# Altium PCB Route_Guide_and_Tuning.PcbDoc (part 5 of 8)
Units mil, origin at the board's own origin, x right, y up, seen from the top; angles counter-clockwise.
Board outline 3600 x 2300 mil, 14 copper layers (L1 TOP, L2_G, L3 SIG, L4_G, L4 SIG, L6_P, L7_G, L10_P, L11_P, L7 SIG, L13_P, L8 SIG, L15_G, L10 BOT), stack 89.291 mil thick; 4 components, 1934 nets, 2174 pads, 2165 vias.
Unrouted connection lines stored in the file: 123.
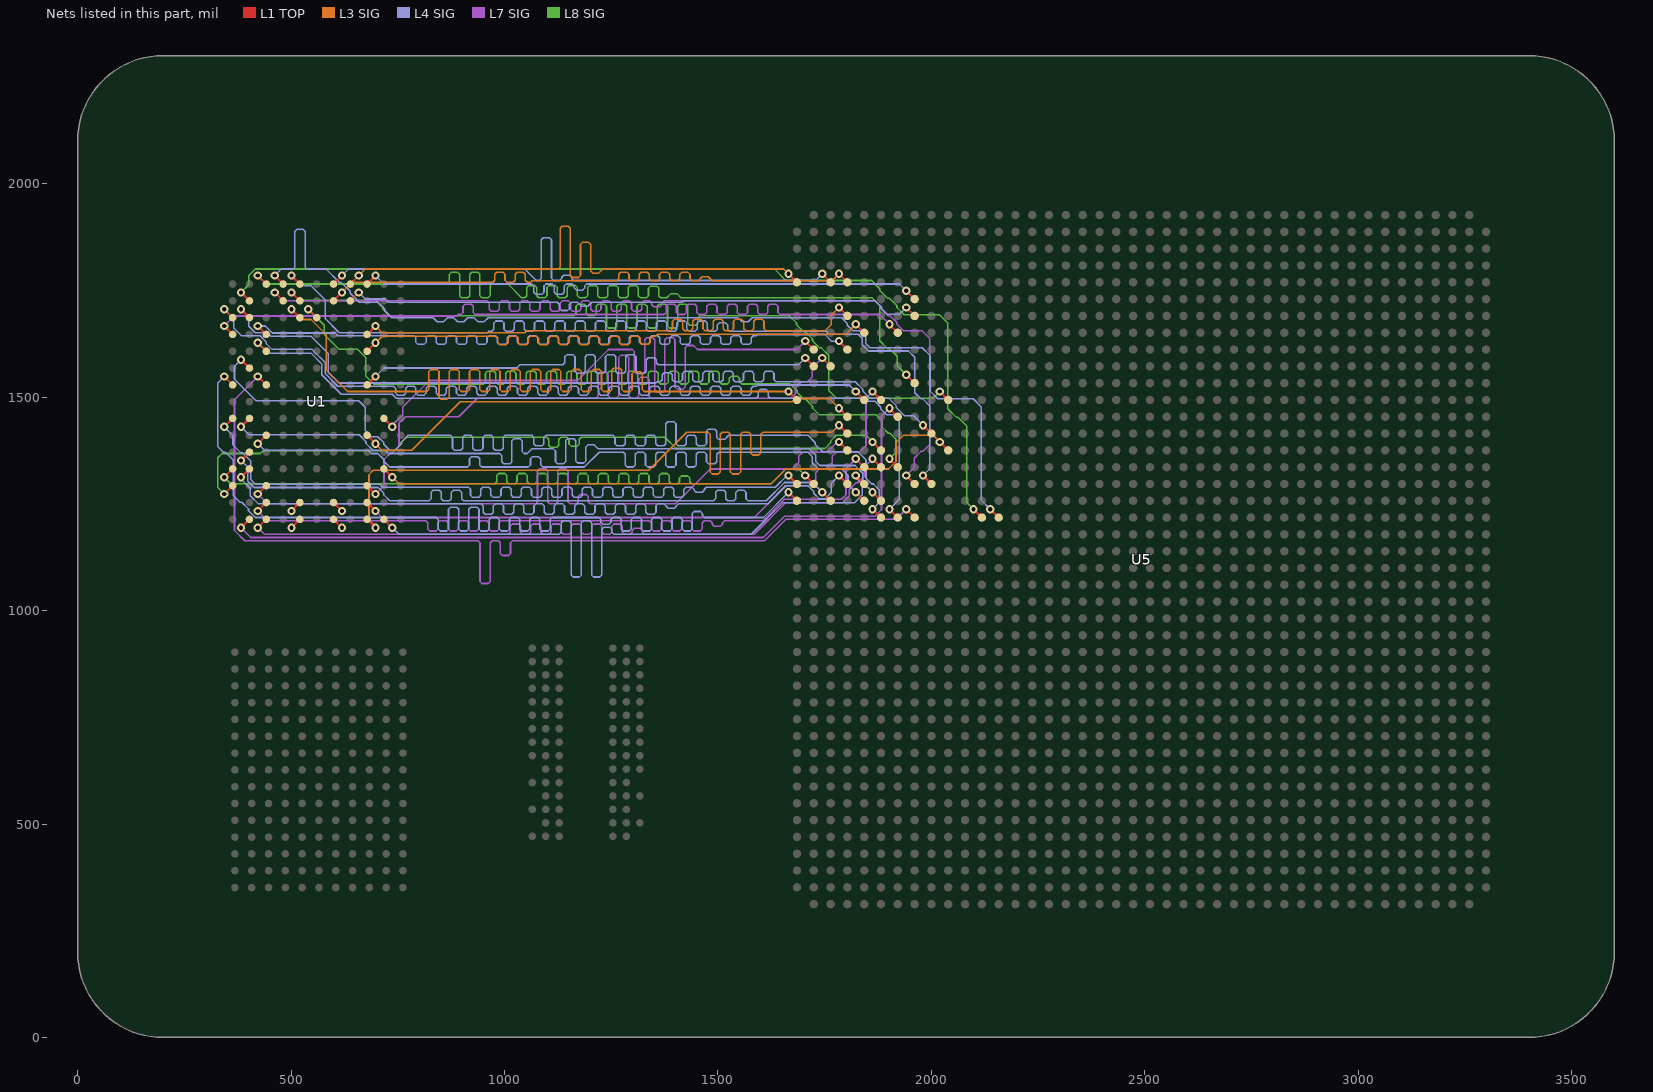
[diagram p17: the nets of this part, all layers, seen from the top]

## Via types
v1: diameter 19.4, hole 10, L1 TOP to L10 BOT, 2087 vias
v2: diameter 18.6, hole 10, L1 TOP to L10 BOT, tented both sides, 78 vias

## Nets (pads, with @x,y where several pads share a name; then routed paths per layer and width w, separated by ;. In a path a pad name is that pad's centre, name@x,y a point inside that pad or via, vN(x,y) a via of type N, cw(c..) or ccw(c..) an arc to the next point about the centre after c; other vN are vias at no path point) (continued)
QDR1.A5: U1.N6 U5.G27 | length 2267.4
  L1 TOP w5: v1(540.43,1705.87) U1.N6@560.12,1686.18 ; v1(1901.69,1355.59) U5.G27@1921.38,1335.91
  L8 SIG w3.8: v1(540.43,1705.87) 578.11,1668.19 578.11,1646.42 612.8,1611.73 656.35,1611.73 675.07,1593.01 675.07,1549.45 693.79,1530.73 950.83,1530.73 955.59,1535.49 955.59,1555.71 960.35,1560.47 974.63,1560.47 979.39,1555.71 979.39,1535.49 984.15,1530.73 998.43,1530.73 1003.19,1535.49 1003.19,1555.71 1007.95,1560.47 1022.23,1560.47 1026.99,1555.71 1026.99,1535.49 1031.75,1530.73 1046.03,1530.73 1050.79,1535.49 1050.79,1555.71 1055.55,1560.47 1069.83,1560.47 1074.59,1555.71 1074.59,1535.49 1079.35,1530.73 1093.63,1530.73 1098.39,1535.49 1098.39,1555.71 1103.15,1560.47 1117.43,1560.47 1122.19,1555.71 1122.19,1535.49 1126.95,1530.73 1141.23,1530.73 1145.99,1535.49 1145.99,1555.71 1150.75,1560.47 1165.03,1560.47 1169.79,1555.71 1169.79,1535.49 1174.55,1530.73 1188.83,1530.73 1193.59,1535.49 1193.59,1555.71 1198.35,1560.47 1212.63,1560.47 1217.39,1555.71 1217.39,1535.49 1222.15,1530.73 1236.43,1530.73 1241.19,1535.49 1241.19,1555.71 1245.95,1560.47 1260.23,1560.47 1264.99,1555.71 1264.99,1535.49 1269.75,1530.73 1284.03,1530.73 1288.79,1535.49 1288.79,1555.71 1293.55,1560.47 1307.83,1560.47 1312.59,1555.71 1312.59,1535.49 1317.35,1530.73 1331.63,1530.73 1336.39,1535.49 1336.39,1555.71 1341.15,1560.47 1355.43,1560.47 1360.19,1555.71 1360.19,1535.49 1364.95,1530.73 1379.23,1530.73 1383.99,1535.49 1383.99,1555.71 1388.75,1560.47 1403.03,1560.47 1407.79,1555.71 1407.79,1535.49 1412.55,1530.73 1426.83,1530.73 1431.59,1535.49 1431.59,1555.71 1436.35,1560.47 1450.63,1560.47 1455.39,1555.71 1455.39,1535.49 1460.15,1530.73 1474.43,1530.73 1479.19,1535.49 1479.19,1555.71 1483.95,1560.47 1498.23,1560.47 1502.99,1555.71 1502.99,1535.49 1507.75,1530.73 1522.03,1530.73 1526.79,1535.49 1526.79,1543.99 1531.55,1548.75 1545.83,1548.75 1550.59,1543.99 1550.59,1535.49 1555.35,1530.73 1669.59,1530.73 1685.48,1514.85 1685.48,1510.66 1701.36,1494.78 1705.55,1494.78 1721.56,1478.76 1721.56,1474.58 1737.83,1458.3 1870.88,1458.3 1885.32,1443.86 1885.32,1428.92 1899.11,1415.13 1903.3,1415.13 1917.09,1401.34 1917.09,1370.99 v1(1901.69,1355.59)
QDR1.A6: U1.N7 U5.A31 | length 2393.2
  L1 TOP w5: v1(501.06,1705.87) U1.N7@520.75,1686.18 ; v1(1665.47,1513.07) U5.A31@1685.16,1493.39
  L3 SIG w3.8: v1(501.06,1705.87) 525.03,1681.9 546.81,1681.9 582.09,1646.61 582.09,1563.69 632.71,1513.07 818.01,1513.07 822.77,1517.83 822.77,1560 827.53,1564.76 841.81,1564.76 846.57,1560 846.57,1500.13 851.33,1495.37 865.61,1495.37 870.37,1500.13 870.37,1560 875.13,1564.76 889.41,1564.76 894.17,1560 894.17,1517.83 898.93,1513.07 913.21,1513.07 917.97,1517.83 917.97,1560 922.73,1564.76 937.01,1564.76 941.77,1560 941.77,1517.83 946.53,1513.07 960.81,1513.07 965.57,1517.83 965.57,1560 970.33,1564.76 984.61,1564.76 989.37,1560 989.37,1517.83 994.13,1513.07 1008.41,1513.07 1013.17,1517.83 1013.17,1560 1017.93,1564.76 1032.21,1564.76 1036.97,1560 1036.97,1517.83 1041.73,1513.07 1056.01,1513.07 1060.77,1517.83 1060.77,1560 1065.53,1564.76 1079.81,1564.76 1084.57,1560 1084.57,1517.83 1089.33,1513.07 1103.61,1513.07 1108.37,1517.83 1108.37,1560 1113.13,1564.76 1127.41,1564.76 1132.17,1560 1132.17,1517.83 1136.93,1513.07 1151.21,1513.07 1155.97,1517.83 1155.97,1560 1160.73,1564.76 1175.01,1564.76 1179.77,1560 1179.77,1517.83 1184.53,1513.07 1198.81,1513.07 1203.57,1517.83 1203.57,1560 1208.33,1564.76 1222.61,1564.76 1227.37,1560 1227.37,1517.83 1232.13,1513.07 1246.41,1513.07 1251.17,1517.83 1251.17,1563.08 1255.93,1567.84 1270.21,1567.84 1274.97,1563.08 1274.97,1517.83 1279.73,1513.07 1294.01,1513.07 1298.77,1517.83 1298.77,1554.35 1303.53,1559.11 1317.81,1559.11 1322.57,1554.35 1322.57,1517.83 1327.33,1513.07 v1(1665.47,1513.07)
QDR1.A7: U1.P4 U5.H36 | length 1406.2
  L1 TOP w3.8: v1(1941.06,1709.92) U5.H36@1960.75,1690.24
  L1 TOP w5: U1.P4@638.86,1725.55 v1(658.54,1745.24)
  L4 SIG w3.8: v1(658.54,1745.24) 673.95,1729.83 720.17,1729.83 727.76,1722.24 1123.62,1722.24 1128.38,1717.48 1128.38,1707.55 1133.14,1702.79 1147.42,1702.79 1152.18,1707.55 1152.18,1717.48 1156.94,1722.24 1171.22,1722.24 1180.74,1712.72 1195.02,1712.72 1204.54,1722.24 1416.6,1722.24 1419.68,1725.32 1868.7,1725.32 1882.01,1712.02 1882.01,1707.83 1895.31,1694.52 1925.66,1694.52 v1(1941.06,1709.92)
QDR1.A8: U1.P5 U5.D38 | length 1428.9
  L1 TOP w3.8: v1(1783.58,1788.66) U5.D38@1803.27,1768.98
  L1 TOP w5: U1.P5@599.49,1725.55 v1(619.17,1745.24)
  L3 SIG w3.8: v1(619.17,1745.24) 643.13,1769.2 972.69,1769.2 977.45,1773.96 977.45,1787.65 982.21,1792.41 996.49,1792.41 1001.25,1787.65 1001.25,1773.96 1006.01,1769.2 1020.29,1769.2 1025.05,1773.96 1025.05,1787.65 1029.81,1792.41 1044.09,1792.41 1048.85,1787.65 1048.85,1773.96 1053.61,1769.2 1060.75,1769.2 1064.26,1772.71 1263.07,1772.71 1267.83,1777.47 1267.83,1787.65 1272.59,1792.41 1286.87,1792.41 1291.63,1787.65 1291.63,1777.47 1296.39,1772.71 1310.67,1772.71 1315.43,1777.47 1315.43,1787.65 1320.19,1792.41 1334.47,1792.41 1339.23,1787.65 1339.23,1777.47 1343.99,1772.71 1358.27,1772.71 1363.03,1777.47 1363.03,1787.65 1367.79,1792.41 1382.07,1792.41 1386.83,1787.65 1386.83,1777.47 1391.59,1772.71 1405.87,1772.71 1410.63,1777.47 1410.63,1787.36 1415.39,1792.12 1429.67,1792.12 1434.43,1787.36 1434.43,1777.47 1439.19,1772.71 1453.47,1772.71 1462.99,1782.23 1477.27,1782.23 1486.79,1772.71 1767.63,1772.71 v1(1783.58,1788.66)
QDR1.A9: U1.P7 U5.K31 | length 2267.4
  L1 TOP w5: v1(501.06,1745.24) U1.P7@520.75,1725.55 ; v1(2019.8,1513.07) U5.K31@2039.49,1493.39
  L8 SIG w3.8: v1(501.06,1745.24) 519.93,1726.37 699.19,1726.37 715.05,1710.51 715.05,1706.32 730.91,1690.47 1162.78,1690.47 1167.54,1695.23 1167.54,1712.98 1172.3,1717.74 1186.58,1717.74 1191.34,1712.98 1191.34,1695.23 1196.1,1690.47 1210.38,1690.47 1215.14,1695.23 1215.14,1712.98 1219.9,1717.74 1234.18,1717.74 1238.94,1712.98 1238.94,1666.56 1243.7,1661.8 1257.98,1661.8 1262.74,1666.56 1262.74,1712.98 1267.5,1717.74 1281.78,1717.74 1286.54,1712.98 1286.54,1666.56 1291.3,1661.8 1305.58,1661.8 1310.34,1666.56 1310.34,1712.98 1315.1,1717.74 1329.38,1717.74 1334.14,1712.98 1334.14,1666.56 1338.9,1661.8 1353.18,1661.8 1357.94,1666.56 1357.94,1712.98 1362.7,1717.74 1376.98,1717.74 1381.74,1712.98 1381.74,1666.56 1386.5,1661.8 1400.78,1661.8 1405.54,1666.56 1405.54,1712.98 1410.3,1717.74 1424.58,1717.74 1429.34,1712.98 1429.34,1673.21 1434.1,1668.45 1448.38,1668.45 1453.14,1673.21 1453.14,1685.71 1457.9,1690.47 1667.34,1690.47 1683.99,1673.81 1683.99,1669.62 1700.65,1652.96 1704.84,1652.96 1721.56,1636.24 1721.56,1632.05 1738.42,1615.19 1742.61,1615.19 1759.61,1598.19 1759.61,1515.26 1777.2,1497.67 2004.4,1497.67 v1(2019.8,1513.07)
QDR1.A10: U1.P8 U5.H26 | length 2300.1
  L1 TOP w5: v1(461.69,1745.24) U1.P8@481.38,1725.55 ; v1(1941.06,1316.22) U5.H26@1960.75,1296.54
  L7 SIG w3.8: v1(461.69,1745.24) 481.59,1725.34 959.53,1725.34 964.29,1720.58 964.29,1705.91 969.05,1701.15 983.33,1701.15 988.09,1705.91 988.09,1720.58 992.85,1725.34 1007.13,1725.34 1011.89,1720.58 1011.89,1705.91 1016.65,1701.15 1030.93,1701.15 1035.69,1705.91 1035.69,1720.58 1040.45,1725.34 1054.73,1725.34 1059.49,1720.58 1059.49,1705.91 1064.25,1701.15 1078.53,1701.15 1083.29,1705.91 1083.29,1720.58 1088.05,1725.34 1102.33,1725.34 1107.09,1720.58 1107.09,1705.91 1111.85,1701.15 1126.13,1701.15 1130.89,1705.91 1130.89,1720.58 1135.65,1725.34 1149.93,1725.34 1154.69,1720.58 1154.69,1705.91 1159.45,1701.15 1173.73,1701.15 1178.49,1705.91 1178.49,1720.58 1183.25,1725.34 1197.53,1725.34 1202.29,1720.58 1202.29,1705.91 1207.05,1701.15 1221.33,1701.15 1226.09,1705.91 1226.09,1720.58 1230.85,1725.34 1245.13,1725.34 1249.89,1720.58 1249.89,1705.91 1254.65,1701.15 1268.93,1701.15 1273.69,1705.91 1273.69,1720.58 1278.45,1725.34 1292.73,1725.34 1297.49,1720.58 1297.49,1705.91 1302.25,1701.15 1316.53,1701.15 1321.29,1705.91 1321.29,1720.58 1326.05,1725.34 1340.33,1725.34 1345.09,1720.58 1345.09,1716.19 1349.85,1711.43 1364.13,1711.43 1368.89,1716.19 1368.89,1720.58 1373.65,1725.34 1868.69,1725.34 1883.87,1710.15 1883.87,1705.96 1899.06,1690.78 1903.24,1690.78 1918.7,1675.33 1918.7,1671.14 1934.68,1655.15 1978.24,1655.15 1995.83,1637.56 1995.83,1388.58 1979.99,1372.74 1975.81,1372.74 1959.97,1356.9 1959.97,1335.13 v1(1941.06,1316.22)
QDR1.A11: U1.A9 U5.F27 | length 1837.4
  L1 TOP w5: v1(422.32,1194.05) U1.A9@442.01,1213.74 ; v1(1862.32,1355.59) U5.F27@1882.01,1335.91
  L7 SIG w3.8: v1(422.32,1194.05) 437.72,1178.65 1008.9,1178.65 1013.66,1183.41 1013.66,1198.06 1018.42,1202.82 1032.7,1202.82 1037.46,1198.06 1037.46,1183.41 1042.22,1178.65 1056.5,1178.65 1061.26,1183.41 1061.26,1198.06 1066.02,1202.82 1080.3,1202.82 1085.06,1198.06 1085.06,1183.41 1089.82,1178.65 1104.1,1178.65 1108.86,1183.41 1108.86,1198.06 1113.62,1202.82 1127.9,1202.82 1132.66,1198.06 1132.66,1183.41 1137.42,1178.65 1151.7,1178.65 1156.46,1183.41 1156.46,1198.06 1161.22,1202.82 1175.5,1202.82 1180.26,1198.06 1180.26,1183.41 1185.02,1178.65 1199.3,1178.65 1204.06,1183.41 1204.06,1198.06 1208.82,1202.82 1223.1,1202.82 1227.86,1198.06 1227.86,1183.41 1232.62,1178.65 1246.9,1178.65 1251.66,1183.41 1251.66,1198.06 1256.42,1202.82 1270.7,1202.82 1275.46,1198.06 1275.46,1183.41 1280.22,1178.65 1294.5,1178.65 1299.26,1183.41 1299.26,1188.17 1304.02,1192.93 1318.3,1192.93 1323.06,1188.17 1323.06,1183.41 1327.82,1178.65 1584.86,1178.65 1659.09,1252.88 1792.14,1252.88 1807.55,1268.29 1807.55,1283.23 1823.39,1299.07 1827.58,1299.07 1843.42,1314.91 1843.42,1336.69 v1(1862.32,1355.59)
QDR1.A12: U1.R3 U5.H37 | length 1406.2
  L1 TOP w5: U1.R3@678.23,1764.92 v1(697.91,1784.61) ; v1(1941.06,1749.29) U5.H37@1960.75,1729.61
  L4 SIG w3.8: v1(697.91,1784.61) 717.6,1764.92 1063.87,1764.92 1068.63,1760.16 1068.63,1745.28 1073.39,1740.52 1087.67,1740.52 1092.43,1745.28 1092.43,1760.16 1097.19,1764.92 1111.47,1764.92 1116.23,1760.16 1116.23,1745.28 1120.99,1740.52 1135.27,1740.52 1140.03,1745.28 1140.03,1760.16 1144.79,1764.92 1159.07,1764.92 1163.83,1760.16 1163.83,1755.37 1168.59,1750.61 1182.87,1750.61 1187.63,1755.37 1187.63,1760.16 1192.39,1764.92 1925.43,1764.92 v1(1941.06,1749.29)
QDR1.A13: U1.R4 U5.A38 | length 1428.9
  L1 TOP w5: U1.R4@638.86,1764.92 v1(658.54,1784.61) ; v1(1665.47,1788.66) U5.A38@1685.16,1768.98
  L3 SIG w3.8: v1(658.54,1784.61) 673.94,1800.01 1125.77,1800.01 1130.53,1804.77 1130.53,1895.25 1135.29,1900.01 1149.57,1900.01 1154.33,1895.25 1154.33,1785.07 1159.09,1780.31 1173.37,1780.31 1178.13,1785.07 1178.13,1857.58 1182.89,1862.34 1197.17,1862.34 1201.93,1857.58 1201.93,1795.25 1206.69,1790.49 1220.97,1790.49 1230.49,1800.01 1654.13,1800.01 v1(1665.47,1788.66)
QDR1.A14: U1.R5 U5.C38 | length 1406.2
  L1 TOP w3.8: v1(1744.21,1788.66) U5.C38@1763.9,1768.98
  L1 TOP w5: U1.R5@599.49,1764.92 v1(619.17,1784.61)
  L4 SIG w3.8: v1(619.17,1784.61) 634.57,1800.01 1047.57,1800.01 1074.31,1773.26 1081.45,1773.26 1086.21,1778.02 1086.21,1868.5 1090.97,1873.26 1105.25,1873.26 1110.01,1868.5 1110.01,1778.02 1114.77,1773.26 1129.05,1773.26 1133.81,1778.02 1133.81,1780.48 1138.57,1785.24 1152.85,1785.24 1157.61,1780.48 1157.61,1778.02 1162.37,1773.26 1728.81,1773.26 v1(1744.21,1788.66)
QDR1.A15: U1.R7 U5.J26 | length 2370.5
  L1 TOP w5: v1(501.06,1784.61) U1.R7@520.75,1764.92 ; v1(1980.43,1316.22) U5.J26@2000.12,1296.54
  L4 SIG w3.8: v1(501.06,1784.61) 525.03,1760.64 546.81,1760.64 579.8,1727.64 579.8,1684.09 612.8,1651.1 960.19,1651.1 963.28,1654.18 970.42,1654.18 975.18,1658.94 975.18,1673.59 979.94,1678.35 994.22,1678.35 998.98,1673.59 998.98,1658.94 1003.74,1654.18 1018.02,1654.18 1022.78,1658.94 1022.78,1673.59 1027.54,1678.35 1041.82,1678.35 1046.58,1673.59 1046.58,1658.94 1051.34,1654.18 1065.62,1654.18 1070.38,1658.94 1070.38,1673.59 1075.14,1678.35 1089.42,1678.35 1094.18,1673.59 1094.18,1658.94 1098.94,1654.18 1113.22,1654.18 1117.98,1658.94 1117.98,1673.59 1122.74,1678.35 1137.02,1678.35 1141.78,1673.59 1141.78,1658.94 1146.54,1654.18 1160.82,1654.18 1165.58,1658.94 1165.58,1673.59 1170.34,1678.35 1184.62,1678.35 1189.38,1673.59 1189.38,1658.94 1194.14,1654.18 1208.42,1654.18 1213.18,1658.94 1213.18,1673.59 1217.94,1678.35 1232.22,1678.35 1236.98,1673.59 1236.98,1658.94 1241.74,1654.18 1256.02,1654.18 1260.78,1658.94 1260.78,1673.59 1265.54,1678.35 1279.82,1678.35 1284.58,1673.59 1284.58,1658.94 1289.34,1654.18 1303.62,1654.18 1308.38,1658.94 1308.38,1673.59 1313.14,1678.35 1327.42,1678.35 1332.18,1673.59 1332.18,1658.94 1336.94,1654.18 1351.22,1654.18 1355.98,1658.94 1355.98,1673.59 1360.74,1678.35 1375.02,1678.35 1379.78,1673.59 1379.78,1658.94 1384.54,1654.18 1398.82,1654.18 1403.58,1658.94 1403.58,1673.59 1408.34,1678.35 1422.62,1678.35 1427.38,1673.59 1427.38,1658.94 1432.14,1654.18 1446.42,1654.18 1451.18,1658.94 1451.18,1673.59 1455.94,1678.35 1470.22,1678.35 1474.98,1673.59 1474.98,1658.94 1479.74,1654.18 1494.02,1654.18 1498.78,1658.94 1498.78,1669.61 1503.54,1674.37 1517.82,1674.37 1522.58,1669.61 1522.58,1658.94 1527.34,1654.18 1753.74,1654.18 1760.37,1647.55 1828.36,1647.55 1838.35,1637.56 1838.35,1622.63 1852.94,1608.03 1946.62,1608.03 1961.21,1593.44 1961.21,1510.51 1975.95,1495.77 1980.14,1495.77 1995.83,1480.08 1995.83,1331.62 v1(1980.43,1316.22)
QDR1.A16: U1.R8 U5.N24 | length 2370.5
  L1 TOP w5: v1(461.69,1784.61) U1.R8@481.38,1764.92 ; v1(2137.91,1237.48) U5.N24@2157.6,1217.8
  L4 SIG w3.8: v1(461.69,1784.61) 477.09,1800.01 504.37,1800.01 509.13,1804.77 509.13,1888.26 513.89,1893.02 528.17,1893.02 532.93,1888.26 532.93,1804.77 537.69,1800.01 581.99,1800.01 612.8,1769.21 616.98,1769.21 638.38,1747.81 638.38,1743.62 659.78,1722.23 703.33,1722.23 719.38,1706.18 719.38,1702 735.42,1685.95 833.2,1685.95 842.72,1676.43 857,1676.43 866.52,1685.95 880.8,1685.95 890.32,1676.43 904.6,1676.43 914.12,1685.95 928.4,1685.95 937.92,1676.43 952.2,1676.43 961.72,1685.95 1547.2,1685.95 1556.72,1676.43 1571,1676.43 1580.52,1685.95 1789.96,1685.95 1803.27,1672.65 1803.27,1668.46 1816.57,1655.15 1831.51,1655.15 1845.95,1640.71 1845.95,1625.77 1856.09,1615.63 1978.39,1615.63 1996.76,1597.26 1996.76,1514.34 2015.13,1495.96 2098.06,1495.96 2116.46,1477.56 2116.46,1258.93 v1(2137.91,1237.48)
QDR1.A17: U1.R9 U5.H32 | length 2267.4
  L1 TOP w5: v1(422.32,1784.61) U1.R9@442.01,1764.92 ; v1(1941.06,1552.44) U5.H32@1960.75,1532.76
  L8 SIG w3.8: v1(422.32,1784.61) 442.01,1764.92 866.27,1764.92 871.03,1769.68 871.03,1787.65 875.79,1792.41 890.07,1792.41 894.83,1787.65 894.83,1737.7 899.59,1732.94 913.87,1732.94 918.63,1737.7 918.63,1787.65 923.39,1792.41 937.67,1792.41 942.43,1787.65 942.43,1737.7 947.19,1732.94 961.47,1732.94 966.23,1737.7 966.23,1760.16 970.99,1764.92 1008,1764.92 1039.99,1732.94 1047.13,1732.94 1051.89,1737.7 1051.89,1756.62 1056.65,1761.38 1070.93,1761.38 1075.69,1756.62 1075.69,1737.7 1080.45,1732.94 1094.73,1732.94 1099.49,1737.7 1099.49,1756.62 1104.25,1761.38 1118.53,1761.38 1123.29,1756.62 1123.29,1737.7 1128.05,1732.94 1142.33,1732.94 1147.09,1737.7 1147.09,1756.62 1151.85,1761.38 1166.13,1761.38 1170.89,1756.62 1170.89,1737.7 1175.65,1732.94 1189.93,1732.94 1194.69,1737.7 1194.69,1756.62 1199.45,1761.38 1213.73,1761.38 1218.49,1756.62 1218.49,1737.7 1223.25,1732.94 1237.53,1732.94 1242.29,1737.7 1242.29,1756.62 1247.05,1761.38 1261.33,1761.38 1266.09,1756.62 1266.09,1737.7 1270.85,1732.94 1285.13,1732.94 1289.89,1737.7 1289.89,1756.62 1294.65,1761.38 1308.93,1761.38 1313.69,1756.62 1313.69,1737.7 1318.45,1732.94 1332.73,1732.94 1337.49,1737.7 1337.49,1755.36 1342.25,1760.12 1356.53,1760.12 1361.29,1755.36 1361.29,1737.7 1366.05,1732.94 1380.33,1732.94 1389.85,1742.46 1404.13,1742.46 1413.65,1732.94 1861.09,1732.94 1879.2,1714.82 1879.2,1631.89 1897.32,1613.77 1901.51,1613.77 1919.71,1595.57 1919.71,1573.79 v1(1941.06,1552.44)
QDR1.A18: U1.A3 U5.D29 | length 1801.8
  L1 TOP w5: U1.A3@678.23,1213.74 v1(697.91,1194.05) ; v1(1783.58,1434.33) U5.D29@1803.27,1414.65
  L3 SIG w3.8: v1(697.91,1194.05) 697.91,1197.96 682.51,1213.36 682.51,1318.54 692.49,1328.52 1337.75,1328.52 1427.19,1417.96 1476.85,1417.96 1481.61,1413.2 1481.61,1324.52 1486.37,1319.76 1500.65,1319.76 1505.41,1324.52 1505.41,1413.2 1510.17,1417.96 1524.45,1417.96 1529.21,1413.2 1529.21,1324.52 1533.97,1319.76 1548.25,1319.76 1553.01,1324.52 1553.01,1413.2 1557.77,1417.96 1572.05,1417.96 1576.81,1413.2 1576.81,1369.27 1581.57,1364.51 1595.85,1364.51 1600.61,1369.27 1600.61,1413.2 1605.37,1417.96 1767.21,1417.96 v1(1783.58,1434.33)
QDR1.A19: U1.A10 U5.G30 | length 1837.4
  L1 TOP w5: v1(382.95,1194.05) U1.A10@402.64,1213.74 ; v1(1901.69,1473.7) U5.G30@1921.38,1454.02
  L7 SIG w3.8: v1(382.95,1194.05) 405.95,1171.05 1605.89,1171.05 1655.94,1221.11 1867.73,1221.11 1883.22,1236.6 1883.22,1455.23 v1(1901.69,1473.7)
QDR1.A20: U1.A2 U5.E26 | length 1779.1
  L1 TOP w5: U1.A2@717.6,1213.74 v1(737.28,1194.05) ; v1(1822.95,1316.22) U5.E26@1842.64,1296.54
  L4 SIG w3.8: v1(737.28,1194.05) 752.68,1178.65 1127.9,1178.65 1132.66,1183.41 1132.66,1205.66 1137.42,1210.42 1151.7,1210.42 1156.46,1205.66 1156.46,1083.41 1161.22,1078.65 1175.5,1078.65 1180.26,1083.41 1180.26,1205.66 1185.02,1210.42 1199.3,1210.42 1204.06,1205.66 1204.06,1083.41 1208.82,1078.65 1223.1,1078.65 1227.86,1083.41 1227.86,1189.99 1232.62,1194.75 1246.9,1194.75 1251.66,1189.99 1251.66,1183.41 1256.42,1178.65 1578.02,1178.65 1652.25,1252.88 1820.76,1252.88 1838.35,1270.47 1838.35,1296.92 1822.95,1312.32 v1(1822.95,1316.22)
QDR1.BWN0: U1.B7 | length 27.8
  L1 TOP w5: v1(501.06,1233.42) U1.B7@520.75,1253.11
QDR1.BWN1: U1.A7 | length 27.8
  L1 TOP w5: v1(501.06,1194.05) U1.A7@520.75,1213.74
QDR1.BWN2: U1.A5 | length 27.8
  L1 TOP w5: U1.A5@599.49,1213.74 v1(619.17,1194.05)
QDR1.BWN3: U1.B5 | length 27.8
  L1 TOP w5: U1.B5@599.49,1253.11 v1(619.17,1233.42)
QDR1.D0: U1.P10 U5.M24 | length 2267.4
  L1 TOP w5: v1(382.95,1745.24) U1.P10@402.64,1725.55 ; v1(2098.54,1237.48) U5.M24@2118.23,1217.8
  L8 SIG w3.8: v1(382.95,1745.24) 400.94,1763.23 400.94,1785 415.94,1800.01 1632.35,1800.01 1659.09,1773.26 1860.13,1773.26 1879.33,1754.06 1879.33,1749.88 1897.99,1731.21 1902.18,1731.21 1919.37,1714.02 1919.37,1709.84 1936.29,1692.92 2019.22,1692.92 2038.38,1673.75 2038.38,1472.72 2058.66,1452.43 2062.85,1452.43 2083.13,1432.15 2083.13,1252.89 v1(2098.54,1237.48)
QDR1.D1: U1.N11 U5.E31 | length 2193
  L1 TOP w5: v1(343.58,1705.87) U1.N11@363.27,1686.18 ; v1(1822.95,1513.07) U5.E31@1842.64,1493.39
  L4 SIG w3.8: v1(343.58,1705.87) 365.37,1684.08 365.37,1662.3 384.17,1643.5 427.73,1643.5 441.52,1629.71 441.52,1625.52 455.31,1611.73 548.99,1611.73 579.8,1580.91 579.8,1555.23 609.65,1525.39 740.14,1525.39 744.9,1520.63 744.9,1509.42 749.66,1504.66 763.94,1504.66 768.7,1509.42 768.7,1520.63 773.46,1525.39 787.74,1525.39 792.5,1520.63 792.5,1509.42 797.26,1504.66 811.54,1504.66 816.3,1509.42 816.3,1520.63 821.06,1525.39 835.34,1525.39 840.1,1520.63 840.1,1509.42 844.86,1504.66 859.14,1504.66 863.9,1509.42 863.9,1520.63 868.66,1525.39 882.94,1525.39 887.7,1520.63 887.7,1509.42 892.46,1504.66 906.74,1504.66 911.5,1509.42 911.5,1520.63 916.26,1525.39 930.54,1525.39 935.3,1520.63 935.3,1509.42 940.06,1504.66 954.34,1504.66 959.1,1509.42 959.1,1520.63 963.86,1525.39 978.14,1525.39 982.9,1520.63 982.9,1509.42 987.66,1504.66 1001.94,1504.66 1006.7,1509.42 1006.7,1520.63 1011.46,1525.39 1025.74,1525.39 1030.5,1520.63 1030.5,1509.42 1035.26,1504.66 1049.54,1504.66 1054.3,1509.42 1054.3,1520.63 1059.06,1525.39 1073.34,1525.39 1078.1,1520.63 1078.1,1509.42 1082.86,1504.66 1097.14,1504.66 1101.9,1509.42 1101.9,1520.63 1106.66,1525.39 1120.94,1525.39 1125.7,1520.63 1125.7,1509.42 1130.46,1504.66 1144.74,1504.66 1149.5,1509.42 1149.5,1520.63 1154.26,1525.39 1168.54,1525.39 1173.3,1520.63 1173.3,1509.42 1178.06,1504.66 1192.34,1504.66 1197.1,1509.42 1197.1,1520.63 1201.86,1525.39 1216.14,1525.39 1220.9,1520.63 1220.9,1509.42 1225.66,1504.66 1239.94,1504.66 1244.7,1509.42 1244.7,1520.63 1249.46,1525.39 1263.74,1525.39 1268.5,1520.63 1268.5,1509.42 1273.26,1504.66 1287.54,1504.66 1292.3,1509.42 1292.3,1520.63 1297.06,1525.39 1311.34,1525.39 1316.1,1520.63 1316.1,1509.42 1320.86,1504.66 1335.14,1504.66 1339.9,1509.42 1339.9,1520.63 1344.66,1525.39 1358.94,1525.39 1363.7,1520.63 1363.7,1509.42 1368.46,1504.66 1382.74,1504.66 1387.5,1509.42 1387.5,1520.63 1392.26,1525.39 1406.54,1525.39 1411.3,1520.63 1411.3,1509.42 1416.06,1504.66 1430.34,1504.66 1435.1,1509.42 1435.1,1520.63 1439.86,1525.39 1454.14,1525.39 1458.9,1520.63 1458.9,1509.42 1463.66,1504.66 1477.94,1504.66 1482.7,1509.42 1482.7,1520.63 1487.46,1525.39 1501.74,1525.39 1506.5,1520.63 1506.5,1509.42 1511.26,1504.66 1525.54,1504.66 1530.3,1509.42 1530.3,1520.63 1535.06,1525.39 1549.34,1525.39 1554.1,1520.63 1554.1,1509.42 1558.86,1504.66 1573.14,1504.66 1577.9,1509.42 1577.9,1520.63 1582.66,1525.39 1589.8,1525.39 1592.88,1528.47 1807.55,1528.47 v1(1822.95,1513.07)
QDR1.D2: U1.M11 U5.G35 | length 1895
  L1 TOP w5: v1(343.58,1666.5) U1.M11@363.27,1646.81 ; v1(1901.69,1670.55) U5.G35@1921.38,1650.87
  L7 SIG w3.8: v1(343.58,1666.5) 367.14,1690.05 887.49,1690.05 890.99,1693.55 898.13,1693.55 902.89,1698.31 902.89,1712.98 907.65,1717.74 921.93,1717.74 926.69,1712.98 926.69,1698.31 931.45,1693.55 1374.13,1693.55 1378.89,1698.31 1378.89,1712.98 1383.65,1717.74 1397.93,1717.74 1402.69,1712.98 1402.69,1698.31 1407.45,1693.55 1421.73,1693.55 1426.49,1698.31 1426.49,1712.98 1431.25,1717.74 1445.53,1717.74 1450.29,1712.98 1450.29,1698.31 1455.05,1693.55 1469.33,1693.55 1474.09,1698.31 1474.09,1712.98 1478.85,1717.74 1493.13,1717.74 1497.89,1712.98 1497.89,1698.31 1502.65,1693.55 1516.93,1693.55 1521.69,1698.31 1521.69,1712.98 1526.45,1717.74 1540.73,1717.74 1545.49,1712.98 1545.49,1698.31 1550.25,1693.55 1564.53,1693.55 1569.29,1698.31 1569.29,1712.98 1574.05,1717.74 1588.33,1717.74 1593.09,1712.98 1593.09,1698.31 1597.85,1693.55 1612.13,1693.55 1616.89,1698.31 1616.89,1712.98 1621.65,1717.74 1635.93,1717.74 1640.69,1712.98 1640.69,1698.31 1645.45,1693.55 1878.69,1693.55 v1(1901.69,1670.55)
QDR1.D3: U1.K10 U5.F24 | length 2370.5
  L1 TOP w5: v1(382.95,1587.76) U1.K10@402.64,1568.07 ; v1(1862.32,1237.48) U5.F24@1882.01,1217.8
  L4 SIG w3.8: v1(382.95,1587.76) 367.55,1572.36 367.55,1542.01 418.03,1491.53 658.44,1491.53 673.94,1476.02 673.94,1421.72 688.4,1407.26 703.33,1407.26 717.12,1393.48 717.12,1389.29 730.91,1375.5 743.66,1375.5 759,1390.84 759,1395.03 774.33,1410.36 873.46,1410.36 878.22,1405.6 878.22,1380.26 882.98,1375.5 897.26,1375.5 902.02,1380.26 902.02,1405.6 906.78,1410.36 921.06,1410.36 925.82,1405.6 925.82,1380.26 930.58,1375.5 944.86,1375.5 949.62,1380.26 949.62,1405.6 954.38,1410.36 968.66,1410.36 973.42,1405.6 973.42,1380.26 978.18,1375.5 992.46,1375.5 997.22,1380.26 997.22,1405.6 1001.98,1410.36 1063.86,1410.36 1068.62,1405.6 1068.62,1390.95 1073.38,1386.19 1087.66,1386.19 1092.42,1390.95 1092.42,1405.6 1097.18,1410.36 1254.26,1410.36 1259.02,1405.6 1259.02,1390.95 1263.78,1386.19 1278.06,1386.19 1282.82,1390.95 1282.82,1405.6 1287.58,1410.36 1301.86,1410.36 1306.62,1405.6 1306.62,1390.95 1311.38,1386.19 1325.66,1386.19 1330.42,1390.95 1330.42,1405.6 1335.18,1410.36 1349.46,1410.36 1354.22,1405.6 1354.22,1390.95 1358.98,1386.19 1373.26,1386.19 1378.02,1390.95 1378.02,1437.37 1382.78,1442.13 1397.06,1442.13 1401.82,1437.37 1401.82,1390.95 1406.58,1386.19 1420.86,1386.19 1425.62,1390.95 1425.62,1405.6 1430.38,1410.36 1444.66,1410.36 1449.42,1405.6 1449.42,1390.95 1454.18,1386.19 1468.46,1386.19 1473.22,1390.95 1473.22,1420.29 1477.98,1425.05 1492.26,1425.05 1497.02,1420.29 1497.02,1405.6 1501.78,1400.84 1516.06,1400.84 1525.58,1410.36 1711.22,1410.36 1728.27,1393.31 1728.27,1389.12 1745.33,1372.07 1828.25,1372.07 1846.91,1353.41 1846.91,1309.85 1860.22,1296.54 1864.41,1296.54 1877.72,1283.23 1877.72,1252.88 v1(1862.32,1237.48)
QDR1.D4: U1.J11 U5.A25 | length 2370.5
  L1 TOP w5: v1(343.58,1548.39) U1.J11@363.27,1528.7 ; v1(1665.47,1276.85) U5.A25@1685.16,1257.17
  L4 SIG w3.8: v1(343.58,1548.39) 328.18,1532.99 328.18,1384.53 342.56,1370.15 346.75,1370.15 364.34,1352.56 364.34,1269.63 380.59,1253.38 384.78,1253.38 400.36,1237.79 400.36,1233.61 415.94,1218.02 840.28,1218.02 845.04,1213.26 845.04,1191.01 849.8,1186.25 864.08,1186.25 868.84,1191.01 868.84,1237.43 873.6,1242.19 887.88,1242.19 892.64,1237.43 892.64,1191.01 897.4,1186.25 911.68,1186.25 916.44,1191.01 916.44,1237.43 921.2,1242.19 935.48,1242.19 940.24,1237.43 940.24,1191.01 945,1186.25 959.28,1186.25 964.04,1191.01 964.04,1213.26 968.8,1218.02 983.08,1218.02 987.84,1213.26 987.84,1191.01 992.6,1186.25 1006.88,1186.25 1011.64,1191.01 1011.64,1213.26 1016.4,1218.02 1030.68,1218.02 1035.44,1213.26 1035.44,1191.01 1040.2,1186.25 1054.48,1186.25 1059.24,1191.01 1059.24,1213.26 1064,1218.02 1078.28,1218.02 1083.04,1213.26 1083.04,1191.01 1087.8,1186.25 1102.08,1186.25 1106.84,1191.01 1106.84,1213.26 1111.6,1218.02 1221.08,1218.02 1225.84,1213.26 1225.84,1207.11 1230.6,1202.35 1244.88,1202.35 1249.64,1207.11 1249.64,1213.26 1254.4,1218.02 1268.68,1218.02 1273.44,1213.26 1273.44,1191.01 1278.2,1186.25 1292.48,1186.25 1297.24,1191.01 1297.24,1213.26 1302,1218.02 1316.28,1218.02 1321.04,1213.26 1321.04,1191.01 1325.8,1186.25 1340.08,1186.25 1344.84,1191.01 1344.84,1213.26 1349.6,1218.02 1363.88,1218.02 1368.64,1213.26 1368.64,1191.01 1373.4,1186.25 1387.68,1186.25 1392.44,1191.01 1392.44,1213.26 1397.2,1218.02 1411.48,1218.02 1416.24,1213.26 1416.24,1191.01 1421,1186.25 1435.28,1186.25 1440.04,1191.01 1440.04,1227.13 1444.8,1231.89 1459.08,1231.89 1463.84,1227.13 1463.84,1222.78 1468.6,1218.02 1606.64,1218.02 v1(1665.47,1276.85)
QDR1.D5: U1.G11 U5.A26 | length 1907.7
  L1 TOP w5: v1(343.58,1430.27) U1.G11@363.27,1449.96 ; v1(1665.47,1316.22) U5.A26@1685.16,1296.54
  L4 SIG w3.8: v1(343.58,1430.27) 364.12,1409.74 364.12,1387.96 382.94,1369.14 387.13,1369.14 405.95,1350.31 405.95,1306.76 416.91,1295.79 707.44,1295.79 714.07,1289.16 915.75,1289.16 920.51,1284.4 920.51,1269.75 925.27,1264.99 939.55,1264.99 944.31,1269.75 944.31,1284.4 949.07,1289.16 963.35,1289.16 968.11,1284.4 968.11,1269.75 972.87,1264.99 987.15,1264.99 991.91,1269.75 991.91,1284.4 996.67,1289.16 1010.95,1289.16 1015.71,1284.4 1015.71,1269.75 1020.47,1264.99 1034.75,1264.99 1039.51,1269.75 1039.51,1284.4 1044.27,1289.16 1058.55,1289.16 1063.31,1284.4 1063.31,1269.75 1068.07,1264.99 1082.35,1264.99 1087.11,1269.75 1087.11,1284.4 1091.87,1289.16 1106.15,1289.16 1110.91,1284.4 1110.91,1269.75 1115.67,1264.99 1129.95,1264.99 1134.71,1269.75 1134.71,1284.4 1139.47,1289.16 1153.75,1289.16 1158.51,1284.4 1158.51,1269.75 1163.27,1264.99 1177.55,1264.99 1182.31,1269.75 1182.31,1284.4 1187.07,1289.16 1201.35,1289.16 1206.11,1284.4 1206.11,1269.75 1210.87,1264.99 1225.15,1264.99 1229.91,1269.75 1229.91,1284.4 1234.67,1289.16 1248.95,1289.16 1253.71,1284.4 1253.71,1269.75 1258.47,1264.99 1272.75,1264.99 1277.51,1269.75 1277.51,1284.4 1282.27,1289.16 1296.55,1289.16 1301.31,1284.4 1301.31,1269.75 1306.07,1264.99 1320.35,1264.99 1325.11,1269.75 1325.11,1284.4 1329.87,1289.16 1344.15,1289.16 1348.91,1284.4 1348.91,1269.75 1353.67,1264.99 1367.95,1264.99 1372.71,1269.75 1372.71,1284.4 1377.47,1289.16 1391.75,1289.16 1396.51,1284.4 1396.51,1269.75 1401.27,1264.99 1415.55,1264.99 1420.31,1269.75 1420.31,1284.4 1425.07,1289.16 1439.35,1289.16 1444.11,1284.4 1444.11,1281.78 1448.87,1277.02 1463.15,1277.02 1467.91,1281.78 1467.91,1284.4 1472.67,1289.16 1634.51,1289.16 1661.57,1316.22 v1(1665.47,1316.22)
QDR1.D6: U1.E10 U5.C25 | length 1653.3
  L1 TOP w5: v1(382.95,1351.53) U1.E10@402.64,1371.22 ; v1(1744.21,1276.85) U5.C25@1763.9,1257.17
  L4 SIG w3.8: v1(382.95,1351.53) 398.35,1336.13 398.35,1303.61 413.77,1288.19 704.29,1288.19 717.6,1274.89 717.6,1270.7 730.91,1257.39 823.33,1257.39 828.09,1262.15 828.09,1276.8 832.85,1281.56 847.13,1281.56 851.89,1276.8 851.89,1262.15 856.65,1257.39 870.93,1257.39 875.69,1262.15 875.69,1276.8 880.45,1281.56 894.73,1281.56 899.49,1276.8 899.49,1262.15 904.25,1257.39 1489.73,1257.39 1494.49,1262.15 1494.49,1276.8 1499.25,1281.56 1513.53,1281.56 1518.29,1276.8 1518.29,1262.15 1523.05,1257.39 1537.33,1257.39 1542.09,1262.15 1542.09,1276.8 1546.85,1281.56 1561.13,1281.56 1565.89,1276.8 1565.89,1262.15 1570.65,1257.39 1613.49,1257.39 1655.94,1299.85 1721.21,1299.85 v1(1744.21,1276.85)
QDR1.D7: U1.D11 U5.B26 | length 1804.6
  L1 TOP w5: v1(343.58,1312.16) U1.D11@363.27,1331.85 ; v1(1704.84,1316.22) U5.B26@1724.53,1296.54
  L8 SIG w3.8: v1(343.58,1312.16) 358.98,1296.76 976.87,1296.76 981.63,1301.52 981.63,1316.17 986.39,1320.93 1000.67,1320.93 1005.43,1316.17 1005.43,1301.52 1010.19,1296.76 1024.47,1296.76 1029.23,1301.52 1029.23,1316.17 1033.99,1320.93 1048.27,1320.93 1053.03,1316.17 1053.03,1301.52 1057.79,1296.76 1072.07,1296.76 1076.83,1301.52 1076.83,1316.17 1081.59,1320.93 1095.87,1320.93 1100.63,1316.17 1100.63,1301.52 1105.39,1296.76 1119.67,1296.76 1124.43,1301.52 1124.43,1316.17 1129.19,1320.93 1143.47,1320.93 1148.23,1316.17 1148.23,1301.52 1152.99,1296.76 1167.27,1296.76 1172.03,1301.52 1172.03,1316.17 1176.79,1320.93 1191.07,1320.93 1195.83,1316.17 1195.83,1301.52 1200.59,1296.76 1214.87,1296.76 1219.63,1301.52 1219.63,1316.17 1224.39,1320.93 1238.67,1320.93 1243.43,1316.17 1243.43,1301.52 1248.19,1296.76 1262.47,1296.76 1267.23,1301.52 1267.23,1316.17 1271.99,1320.93 1286.27,1320.93 1291.03,1316.17 1291.03,1301.52 1295.79,1296.76 1310.07,1296.76 1314.83,1301.52 1314.83,1316.17 1319.59,1320.93 1333.87,1320.93 1338.63,1316.17 1338.63,1301.52 1343.39,1296.76 1357.67,1296.76 1362.43,1301.52 1362.43,1316.17 1367.19,1320.93 1381.47,1320.93 1386.23,1316.17 1386.23,1301.52 1390.99,1296.76 1405.27,1296.76 1410.03,1301.52 1410.03,1310.49 1414.79,1315.25 1429.07,1315.25 1433.83,1310.49 1433.83,1301.52 1438.59,1296.76 1624.23,1296.76 1659.09,1331.62 1689.44,1331.62 v1(1704.84,1316.22)
QDR1.D8: U1.C11 U5.F28 | length 1804.6
  L1 TOP w5: v1(343.58,1272.79) U1.C11@363.27,1292.48 ; v1(1862.32,1394.96) U5.F28@1882.01,1375.28
  L8 SIG w3.8: v1(343.58,1272.79) 328.18,1288.19 328.18,1357.91 338.17,1367.9 427.94,1367.9 434.57,1374.53 742.69,1374.53 756.48,1388.33 756.48,1392.51 770.28,1406.3 1098.85,1406.3 1103.61,1401.54 1103.61,1386.89 1108.37,1382.13 1122.65,1382.13 1127.41,1386.89 1127.41,1401.54 1132.17,1406.3 1146.45,1406.3 1151.21,1401.54 1151.21,1390 1155.97,1385.24 1170.25,1385.24 1175.01,1390 1175.01,1401.54 1179.77,1406.3 1375.17,1406.3 1401.91,1379.56 1750.59,1379.56 1763.9,1392.87 1763.9,1397.06 1777.2,1410.36 1846.92,1410.36 v1(1862.32,1394.96)
QDR1.D9: U1.N10 U5.J29 | length 2028.4
  L1 TOP w5: v1(382.95,1705.87) U1.N10@402.64,1686.18 ; v1(1980.43,1434.33) U5.J29@2000.12,1414.65
  L4 SIG w3.8: v1(382.95,1705.87) 400.94,1687.88 400.94,1666.1 415.94,1651.1 444.57,1651.1 453.14,1642.53 546.81,1642.53 587.4,1601.93 587.4,1558.38 612.8,1532.99 1354.54,1532.99 1357.63,1536.07 1364.77,1536.07 1369.53,1540.83 1369.53,1552.4 1374.29,1557.16 1388.57,1557.16 1393.33,1552.4 1393.33,1540.83 1398.09,1536.07 1412.37,1536.07 1417.13,1540.83 1417.13,1555.49 1421.89,1560.25 1436.17,1560.25 1440.93,1555.49 1440.93,1540.83 1445.69,1536.07 1459.97,1536.07 1464.73,1540.83 1464.73,1555.49 1469.49,1560.25 1483.77,1560.25 1488.53,1555.49 1488.53,1540.83 1493.29,1536.07 1507.57,1536.07 1512.33,1540.83 1512.33,1555.49 1517.09,1560.25 1531.37,1560.25 1536.13,1555.49 1536.13,1540.83 1540.89,1536.07 1555.17,1536.07 1559.93,1540.83 1559.93,1555.49 1564.69,1560.25 1578.97,1560.25 1583.73,1555.49 1583.73,1540.83 1588.49,1536.07 1602.77,1536.07 1607.53,1540.83 1607.53,1555.49 1612.29,1560.25 1626.57,1560.25 1631.33,1555.49 1631.33,1540.83 1636.09,1536.07 1821.73,1536.07 1838.84,1518.97 1838.84,1514.78 1855.94,1497.67 1899.5,1497.67 1918.15,1479.02 1918.15,1474.83 1936.8,1456.18 1958.58,1456.18 v1(1980.43,1434.33)
QDR1.D10: U1.M9 U5.D34 | length 1928.4
  L1 TOP w5: v1(422.32,1666.5) U1.M9@442.01,1646.81 ; v1(1783.58,1631.18) U5.D34@1803.27,1611.5
  L4 SIG w3.8: v1(422.32,1666.5) 439.91,1666.5 456.28,1650.13 603.02,1650.13 609.65,1643.5 787.74,1643.5 792.5,1638.74 792.5,1628.14 797.26,1623.38 811.54,1623.38 816.3,1628.14 816.3,1638.74 821.06,1643.5 835.34,1643.5 840.1,1638.74 840.1,1628.14 844.86,1623.38 859.14,1623.38 863.9,1628.14 863.9,1638.74 868.66,1643.5 882.94,1643.5 887.7,1638.74 887.7,1628.14 892.46,1623.38 906.74,1623.38 911.5,1628.14 911.5,1638.74 916.26,1643.5 930.54,1643.5 935.3,1638.74 935.3,1628.14 940.06,1623.38 954.34,1623.38 959.1,1628.14 959.1,1638.74 963.86,1643.5 978.14,1643.5 982.9,1638.74 982.9,1628.14 987.66,1623.38 1001.94,1623.38 1006.7,1628.14 1006.7,1638.74 1011.46,1643.5 1025.74,1643.5 1030.5,1638.74 1030.5,1628.14 1035.26,1623.38 1049.54,1623.38 1054.3,1628.14 1054.3,1638.74 1059.06,1643.5 1073.34,1643.5 1078.1,1638.74 1078.1,1628.14 1082.86,1623.38 1097.14,1623.38 1101.9,1628.14 1101.9,1638.74 1106.66,1643.5 1120.94,1643.5 1125.7,1638.74 1125.7,1628.14 1130.46,1623.38 1144.74,1623.38 1149.5,1628.14 1149.5,1638.74 1154.26,1643.5 1168.54,1643.5 1173.3,1638.74 1173.3,1628.14 1178.06,1623.38 1192.34,1623.38 1197.1,1628.14 1197.1,1638.74 1201.86,1643.5 1216.14,1643.5 1220.9,1638.74 1220.9,1628.14 1225.66,1623.38 1239.94,1623.38 1244.7,1628.14 1244.7,1638.74 1249.46,1643.5 1263.74,1643.5 1268.5,1638.74 1268.5,1628.14 1273.26,1623.38 1287.54,1623.38 1292.3,1628.14 1292.3,1638.74 1297.06,1643.5 1311.34,1643.5 1316.1,1638.74 1316.1,1628.14 1320.86,1623.38 1335.14,1623.38 1339.9,1628.14 1339.9,1638.74 1344.66,1643.5 1358.94,1643.5 1363.7,1638.74 1363.7,1628.14 1368.46,1623.38 1382.74,1623.38 1387.5,1628.14 1387.5,1638.74 1392.26,1643.5 1406.54,1643.5 1411.3,1638.74 1411.3,1628.14 1416.06,1623.38 1430.34,1623.38 1435.1,1628.14 1435.1,1638.74 1439.86,1643.5 1454.14,1643.5 1458.9,1638.74 1458.9,1628.14 1463.66,1623.38 1477.94,1623.38 1482.7,1628.14 1482.7,1638.74 1487.46,1643.5 1501.74,1643.5 1506.5,1638.74 1506.5,1628.14 1511.26,1623.38 1525.54,1623.38 1530.3,1628.14 1530.3,1638.74 1535.06,1643.5 1549.34,1643.5 1554.1,1638.74 1554.1,1628.14 1558.86,1623.38 1573.14,1623.38 1577.9,1628.14 1577.9,1638.74 1582.66,1643.5 1589.8,1643.5 1592.88,1646.58 1750.59,1646.58 1765.99,1631.18 v1(1783.58,1631.18)
QDR1.D11: U1.L9 U5.G24 | length 1897.7
  L1 TOP w5: v1(422.32,1627.13) U1.L9@442.01,1607.44 ; v1(1901.69,1237.48) U5.G24@1921.38,1217.8
  L4 SIG w3.8: v1(422.32,1627.13) 446.29,1603.16 546.81,1603.16 572.2,1577.76 572.2,1552.08 617.56,1506.73 736.85,1506.73 746.51,1497.06 1589.36,1497.06 1594.12,1501.82 1594.12,1513.03 1598.88,1517.79 1613.16,1517.79 1617.92,1513.03 1617.92,1501.82 1622.68,1497.06 1832.12,1497.06 1839.11,1490.07 1867.73,1490.07 1881.52,1476.28 1881.52,1472.09 1895.31,1458.3 1910.25,1458.3 1924.69,1443.86 1924.69,1260.48 v1(1901.69,1237.48)
QDR1.D12: U1.J9 U5.H24 | length 2300.1
  L1 TOP w5: v1(422.32,1548.39) U1.J9@442.01,1528.7 ; v1(1941.06,1237.48) U5.H24@1960.75,1217.8
  L7 SIG w3.8: v1(422.32,1548.39) 367.55,1493.62 367.55,1187.68 391.77,1163.45 937.87,1163.45 942.63,1158.69 942.63,1068.21 947.39,1063.45 961.67,1063.45 966.43,1068.21 966.43,1158.69 971.19,1163.45 985.47,1163.45 990.23,1158.69 990.23,1133.63 994.99,1128.87 1009.27,1128.87 1014.03,1133.63 1014.03,1158.69 1018.79,1163.45 1609.03,1163.45 1659.09,1213.51 1917.09,1213.51 v1(1941.06,1237.48)
QDR1.D13: U1.G10 U5.F25 | length 1907.7
  L1 TOP w5: v1(382.95,1430.27) U1.G10@402.64,1449.96 ; v1(1862.32,1276.85) U5.F25@1882.01,1257.17
  L4 SIG w3.8: v1(382.95,1430.27) 401.59,1411.64 659.59,1411.64 675.56,1395.67 675.56,1391.48 691.54,1375.5 720.16,1375.5 727.76,1367.9 988.9,1367.9 993.66,1363.14 993.66,1348.49 998.42,1343.73 1012.7,1343.73 1017.46,1348.49 1017.46,1398 1022.22,1402.76 1036.5,1402.76 1041.26,1398 1041.26,1372.66 1046.02,1367.9 1053.16,1367.9 1063.85,1378.59 1114.61,1378.59 1119.37,1373.83 1119.37,1348.49 1124.13,1343.73 1138.41,1343.73 1143.17,1348.49 1143.17,1398 1147.93,1402.76 1162.21,1402.76 1166.97,1398 1166.97,1350.48 1171.73,1345.72 1186.01,1345.72 1190.77,1350.48 1190.77,1383.35 1195.53,1388.11 1209.81,1388.11 1219.33,1378.59 1714.37,1378.59 1728.81,1364.15 1728.81,1349.21 1738.36,1339.67 1821.28,1339.67 1839.31,1321.64 1839.31,1306.7 1845.95,1300.06 1845.95,1293.22 v1(1862.32,1276.85)
QDR1.D14: U1.F9 U5.E25 | length 1907.7
  L1 TOP w5: v1(422.32,1390.9) U1.F9@442.01,1410.59 ; v1(1822.95,1276.85) U5.E25@1842.64,1257.17
  L4 SIG w3.8: v1(422.32,1390.9) 437.72,1375.5 680.79,1375.5 688.39,1367.9 703.32,1367.9 717.11,1354.11 717.11,1349.93 730.91,1336.13 913.25,1336.13 918.01,1340.89 918.01,1355.54 922.77,1360.3 937.05,1360.3 941.81,1355.54 941.81,1340.89 946.57,1336.13 1056.05,1336.13 1060.81,1340.89 1060.81,1355.54 1065.57,1360.3 1079.85,1360.3 1084.61,1355.54 1084.61,1340.89 1089.37,1336.13 1187.17,1336.13 1222.03,1370.99 1278.06,1370.99 1282.82,1366.23 1282.82,1340.89 1287.58,1336.13 1301.86,1336.13 1306.62,1340.89 1306.62,1366.23 1311.38,1370.99 1325.66,1370.99 1330.42,1366.23 1330.42,1340.89 1335.18,1336.13 1349.46,1336.13 1354.22,1340.89 1354.22,1366.23 1358.98,1370.99 1373.26,1370.99 1378.02,1366.23 1378.02,1340.89 1382.78,1336.13 1397.06,1336.13 1401.82,1340.89 1401.82,1366.23 1406.58,1370.99 1420.86,1370.99 1425.62,1366.23 1425.62,1340.89 1430.38,1336.13 1444.66,1336.13 1449.42,1340.89 1449.42,1366.23 1454.18,1370.99 1468.46,1370.99 1473.22,1366.23 1473.22,1348.83 1477.98,1344.07 1492.26,1344.07 1497.02,1348.83 1497.02,1366.23 1501.78,1370.99 1711.22,1370.99 1721.21,1361 1721.21,1346.06 1735.66,1331.62 1789.96,1331.62 1804.74,1316.84 1804.74,1295.06 v1(1822.95,1276.85)
QDR1.D15: U1.D10 U5.D26 | length 1907.7
  L1 TOP w5: v1(382.95,1312.16) U1.D10@402.64,1331.85 ; v1(1783.58,1316.22) U5.D26@1803.27,1296.54
  L4 SIG w3.8: v1(382.95,1312.16) 382.95,1308.26 404.74,1286.47 404.74,1268.6 423.54,1249.79 945.47,1249.79 950.23,1245.03 950.23,1230.38 954.99,1225.62 969.27,1225.62 974.03,1230.38 974.03,1245.03 978.79,1249.79 993.07,1249.79 997.83,1245.03 997.83,1230.38 1002.59,1225.62 1016.87,1225.62 1021.63,1230.38 1021.63,1245.03 1026.39,1249.79 1040.67,1249.79 1045.43,1245.03 1045.43,1230.38 1050.19,1225.62 1064.47,1225.62 1069.23,1230.38 1069.23,1245.03 1073.99,1249.79 1088.27,1249.79 1093.03,1245.03 1093.03,1230.38 1097.79,1225.62 1112.07,1225.62 1116.83,1230.38 1116.83,1245.03 1121.59,1249.79 1135.87,1249.79 1140.63,1245.03 1140.63,1230.38 1145.39,1225.62 1159.67,1225.62 1164.43,1230.38 1164.43,1245.03 1169.19,1249.79 1183.47,1249.79 1188.23,1245.03 1188.23,1230.38 1192.99,1225.62 1207.27,1225.62 1212.03,1230.38 1212.03,1245.03 1216.79,1249.79 1231.07,1249.79 1235.83,1245.03 1235.83,1230.38 1240.59,1225.62 1254.87,1225.62 1259.63,1230.38 1259.63,1245.03 1264.39,1249.79 1278.67,1249.79 1283.43,1245.03 1283.43,1230.38 1288.19,1225.62 1302.47,1225.62 1307.23,1230.38 1307.23,1245.03 1311.99,1249.79 1326.27,1249.79 1331.03,1245.03 1331.03,1230.38 1335.79,1225.62 1350.07,1225.62 1354.83,1230.38 1354.83,1245.03 1359.59,1249.79 1373.87,1249.79 1378.63,1245.03 1378.63,1244.03 1383.39,1239.27 1397.67,1239.27 1402.43,1244.03 1402.43,1245.03 1407.19,1249.79 1616.63,1249.79 1659.09,1292.25 1711.22,1292.25 1724.53,1278.95 1724.53,1274.76 1737.83,1261.45 1750.59,1261.45 1765.59,1276.45 1765.59,1298.23 v1(1783.58,1316.22)
QDR1.D16: U1.C9 U5.D28 | length 1837.4
  L1 TOP w5: v1(422.32,1272.79) U1.C9@442.01,1292.48 ; v1(1783.58,1394.96) U5.D28@1803.27,1375.28
  L7 SIG w3.8: v1(422.32,1272.79) 445.32,1249.79 1072.7,1249.79 1077.46,1254.55 1077.46,1327.82 1082.22,1332.58 1096.5,1332.58 1101.26,1327.82 1101.26,1254.55 1106.02,1249.79 1120.3,1249.79 1125.06,1254.55 1125.06,1327.82 1129.82,1332.58 1144.1,1332.58 1148.86,1327.82 1148.86,1254.55 1153.62,1249.79 1167.9,1249.79 1172.66,1254.55 1172.66,1267.21 1177.42,1271.97 1191.7,1271.97 1196.46,1267.21 1196.46,1254.55 1201.22,1249.79 1400.28,1249.79 1482.11,1331.62 1674.03,1331.62 1689.43,1347.03 1689.43,1361.96 1698.47,1371 1755.72,1371 1779.68,1394.96 v1(1783.58,1394.96)
QDR1.D17: U1.B9 U5.E27 | length 1837.4
  L1 TOP w5: v1(422.32,1233.42) U1.B9@442.01,1253.11 ; v1(1822.95,1355.59) U5.E27@1842.64,1335.91
  L7 SIG w3.8: v1(422.32,1233.42) 445.32,1210.42 815.73,1210.42 820.49,1205.66 820.49,1191.01 825.25,1186.25 839.53,1186.25 844.29,1191.01 844.29,1205.66 849.05,1210.42 863.33,1210.42 868.09,1205.66 868.09,1191.01 872.85,1186.25 887.13,1186.25 891.89,1191.01 891.89,1205.66 896.65,1210.42 910.93,1210.42 915.69,1205.66 915.69,1191.01 920.45,1186.25 934.73,1186.25 939.49,1191.01 939.49,1205.66 944.25,1210.42 958.53,1210.42 963.29,1205.66 963.29,1191.01 968.05,1186.25 982.33,1186.25 987.09,1191.01 987.09,1205.66 991.85,1210.42 1339.33,1210.42 1344.09,1205.66 1344.09,1191.01 1348.85,1186.25 1363.13,1186.25 1367.89,1191.01 1367.89,1205.66 1372.65,1210.42 1386.93,1210.42 1391.69,1205.66 1391.69,1191.01 1396.45,1186.25 1410.73,1186.25 1415.49,1191.01 1415.49,1205.66 1420.25,1210.42 1434.53,1210.42 1439.29,1205.66 1439.29,1191.01 1444.05,1186.25 1458.33,1186.25 1463.09,1191.01 1463.09,1205.66 1467.85,1210.42 1482.13,1210.42 1486.89,1205.66 1486.89,1201.96 1491.65,1197.2 1505.93,1197.2 1510.69,1201.96 1510.69,1205.66 1515.45,1210.42 1605.89,1210.42 1655.94,1260.48 1788.99,1260.48 1799.95,1271.44 1799.95,1332.59 v1(1822.95,1355.59)
QDR1.D18: U1.B3 U5.F31 | length 1431.4
  L1 TOP w5: U1.B3@678.23,1253.11 v1(697.91,1233.42) ; v1(1862.32,1513.07) U5.F31@1882.01,1493.39
  L7 SIG w3.8: v1(697.91,1233.42) 713.31,1218.02 1584.87,1218.02 1659.09,1292.25 1713.4,1292.25 1728.8,1307.65 1728.8,1322.59 1737.85,1331.63 1752.78,1331.63 1768.18,1347.03 1768.18,1361.96 1777.2,1370.99 1831.51,1370.99 1846.9,1386.39 1846.9,1497.65 v1(1862.32,1513.07)
QDR1.D19: U1.C3 U5.C33 | length 1708.8
  L1 TOP w5: U1.C3@678.23,1292.48 v1(697.91,1272.79) ; v1(1744.21,1591.81) U5.C33@1763.9,1572.13
  L7 SIG w3.8: v1(697.91,1272.79) 717.62,1292.5 717.62,1353.65 733.37,1369.4 737.56,1369.4 752.83,1384.67 752.83,1438.98 768.1,1454.24 893.1,1454.24 936.52,1497.66 1214.88,1497.66 1219.64,1502.42 1219.64,1553.17 1224.4,1557.93 1238.68,1557.93 1243.44,1553.17 1243.44,1502.42 1248.2,1497.66 1262.48,1497.66 1267.24,1502.42 1267.24,1592.9 1272,1597.66 1286.28,1597.66 1291.04,1592.9 1291.04,1502.42 1295.8,1497.66 1310.08,1497.66 1314.84,1502.42 1314.84,1542.12 1319.6,1546.88 1333.88,1546.88 1338.64,1542.12 1338.64,1502.42 1343.4,1497.66 1671.84,1497.66 1681.83,1507.65 1681.83,1522.59 1695.32,1536.08 1710.26,1536.08 1721.2,1547.02 1721.2,1568.8 v1(1744.21,1591.81)
QDR1.D20: U1.D2 U5.K28 | length 1423.5
  L1 TOP w5: U1.D2@717.6,1331.85 v1(737.28,1312.16) ; v1(2019.8,1394.96) U5.K28@2039.49,1375.28
  L3 SIG w3.8: v1(737.28,1312.16) 752.68,1296.76 1624.24,1296.76 1659.09,1331.62 1899.5,1331.62 1917.09,1349.21 1917.09,1392.77 1934.68,1410.36 2004.4,1410.36 v1(2019.8,1394.96)
QDR1.D21: U1.F3 U5.D30 | length 1207.5
  L1 TOP w5: U1.F3@678.23,1410.59 v1(697.91,1390.9) ; v1(1783.58,1473.7) U5.D30@1803.27,1454.02
  L3 SIG w3.8: v1(697.91,1390.9) 713.31,1375.5 783.03,1375.5 896.63,1489.1 1674.03,1489.1 1681.63,1496.7 1760.58,1496.7 v1(1783.58,1473.7)
QDR1.D22: U1.G2 U5.B34 | length 1708.8
  L1 TOP w5: U1.G2@717.6,1449.96 v1(737.28,1430.27) ; v1(1704.84,1631.18) U5.B34@1724.53,1611.5
  L7 SIG w3.8: v1(737.28,1430.27) 737.28,1434.18 761.25,1458.15 761.25,1476.02 824.27,1539.04 1171.28,1539.04 1243.74,1611.5 1299.6,1611.5 1304.36,1606.74 1304.36,1559.25 1309.12,1554.49 1323.4,1554.49 1328.16,1559.25 1328.16,1634.28 1332.92,1639.04 1347.2,1639.04 1351.96,1634.28 1351.96,1516.26 1356.72,1511.5 1371,1511.5 1375.76,1516.26 1375.76,1634.28 1380.52,1639.04 1394.8,1639.04 1399.56,1634.28 1399.56,1523.57 1404.32,1518.81 1418.6,1518.81 1423.36,1523.57 1423.36,1616.26 1428.12,1621.02 1442.4,1621.02 1451.92,1611.5 1685.16,1611.5 v1(1704.84,1631.18)
QDR1.D23: U1.J3 U5.B33 | length 1406.2
  L1 TOP w5: U1.J3@678.23,1528.7 v1(697.91,1548.39) ; v1(1704.84,1591.81) U5.B33@1724.53,1572.13
  L4 SIG w3.8: v1(697.91,1548.39) 717.6,1568.07 1028.76,1568.07 1036.54,1575.86 1136.73,1575.86 1141.49,1580.62 1141.49,1594.86 1146.25,1599.62 1160.53,1599.62 1165.29,1594.86 1165.29,1560.75 1170.05,1555.99 1184.33,1555.99 1189.09,1560.75 1189.09,1594.86 1193.85,1599.62 1208.13,1599.62 1212.89,1594.86 1212.89,1560.75 1217.65,1555.99 1231.93,1555.99 1236.69,1560.75 1236.69,1594.86 1241.45,1599.62 1255.73,1599.62 1260.49,1594.86 1260.49,1560.75 1265.25,1555.99 1279.53,1555.99 1284.29,1560.75 1284.29,1594.86 1289.05,1599.62 1303.33,1599.62 1308.09,1594.86 1308.09,1560.75 1312.85,1555.99 1327.13,1555.99 1331.89,1560.75 1331.89,1587.24 1336.65,1592 1350.93,1592 1355.69,1587.24 1355.69,1580.62 1360.45,1575.86 1688.89,1575.86 v1(1704.84,1591.81)
QDR1.D24: U1.L3 U5.E35 | length 1428.9
  L1 TOP w5: U1.L3@678.23,1607.44 v1(697.91,1627.13) ; v1(1822.95,1670.55) U5.E35@1842.64,1650.87
  L3 SIG w3.8: v1(697.91,1627.13) 713.33,1642.54 979.87,1642.54 984.63,1637.78 984.63,1627.17 989.39,1622.41 1003.67,1622.41 1008.43,1627.17 1008.43,1637.78 1013.19,1642.54 1027.47,1642.54 1032.23,1637.78 1032.23,1627.17 1036.99,1622.41 1051.27,1622.41 1056.03,1627.17 1056.03,1637.78 1060.79,1642.54 1075.07,1642.54 1079.83,1637.78 1079.83,1627.17 1084.59,1622.41 1098.87,1622.41 1103.63,1627.17 1103.63,1637.78 1108.39,1642.54 1122.67,1642.54 1127.43,1637.78 1127.43,1627.17 1132.19,1622.41 1146.47,1622.41 1151.23,1627.17 1151.23,1637.78 1155.99,1642.54 1170.27,1642.54 1175.03,1637.78 1175.03,1627.17 1179.79,1622.41 1194.07,1622.41 1198.83,1627.17 1198.83,1637.78 1203.59,1642.54 1217.87,1642.54 1222.63,1637.78 1222.63,1627.17 1227.39,1622.41 1241.67,1622.41 1246.43,1627.17 1246.43,1637.78 1251.19,1642.54 1265.47,1642.54 1270.23,1637.78 1270.23,1627.17 1274.99,1622.41 1289.27,1622.41 1294.03,1627.17 1294.03,1637.78 1298.79,1642.54 1313.07,1642.54 1317.83,1637.78 1317.83,1628.47 1322.59,1623.71 1336.87,1623.71 1341.63,1628.47 1341.63,1637.78 1346.39,1642.54 1353.53,1642.54 1358.53,1647.54 1799.94,1647.54 v1(1822.95,1670.55)
QDR1.D25: U1.M3 U5.D36 | length 1404
  L1 TOP w5: U1.M3@678.23,1646.81 v1(697.91,1666.5) ; v1(1783.58,1709.92) U5.D36@1803.27,1690.24
  L3 SIG w3.8: v1(697.91,1666.5) 713.31,1651.1 1047.59,1651.1 1051.63,1655.14 1388.82,1655.14 1393.58,1659.9 1393.58,1677.88 1398.34,1682.64 1412.62,1682.64 1417.38,1677.88 1417.38,1659.9 1422.14,1655.14 1436.42,1655.14 1441.18,1659.9 1441.18,1677.88 1445.94,1682.64 1460.22,1682.64 1464.98,1677.88 1464.98,1659.9 1469.74,1655.14 1484.02,1655.14 1488.78,1659.9 1488.78,1677.88 1493.54,1682.64 1507.82,1682.64 1512.58,1677.88 1512.58,1659.9 1517.34,1655.14 1531.62,1655.14 1536.38,1659.9 1536.38,1677.88 1541.14,1682.64 1555.42,1682.64 1560.18,1677.88 1560.18,1659.9 1564.94,1655.14 1579.22,1655.14 1583.98,1659.9 1583.98,1677.88 1588.74,1682.64 1603.02,1682.64 1607.78,1677.88 1607.78,1659.9 1612.54,1655.14 1750.58,1655.14 1765.59,1670.15 1765.59,1691.93 v1(1783.58,1709.92)